# EAGLE board Projeto Lora (EAGLE 9.6.2)
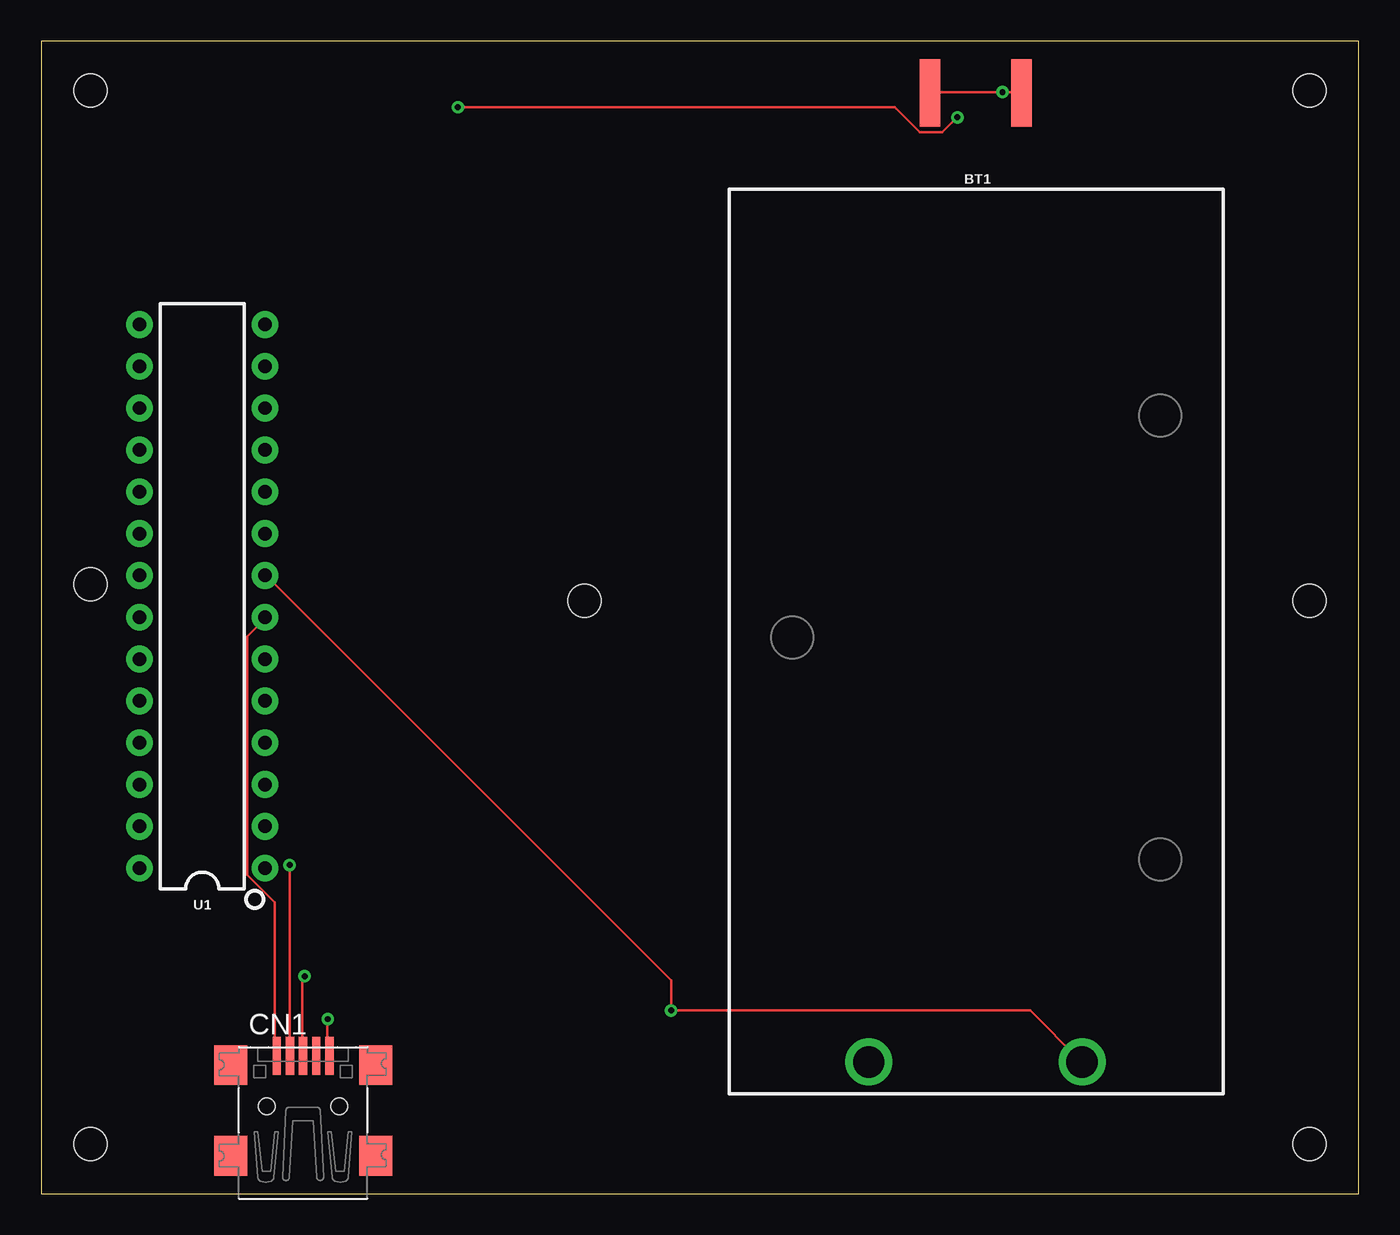
[diagram p0: board, top side]
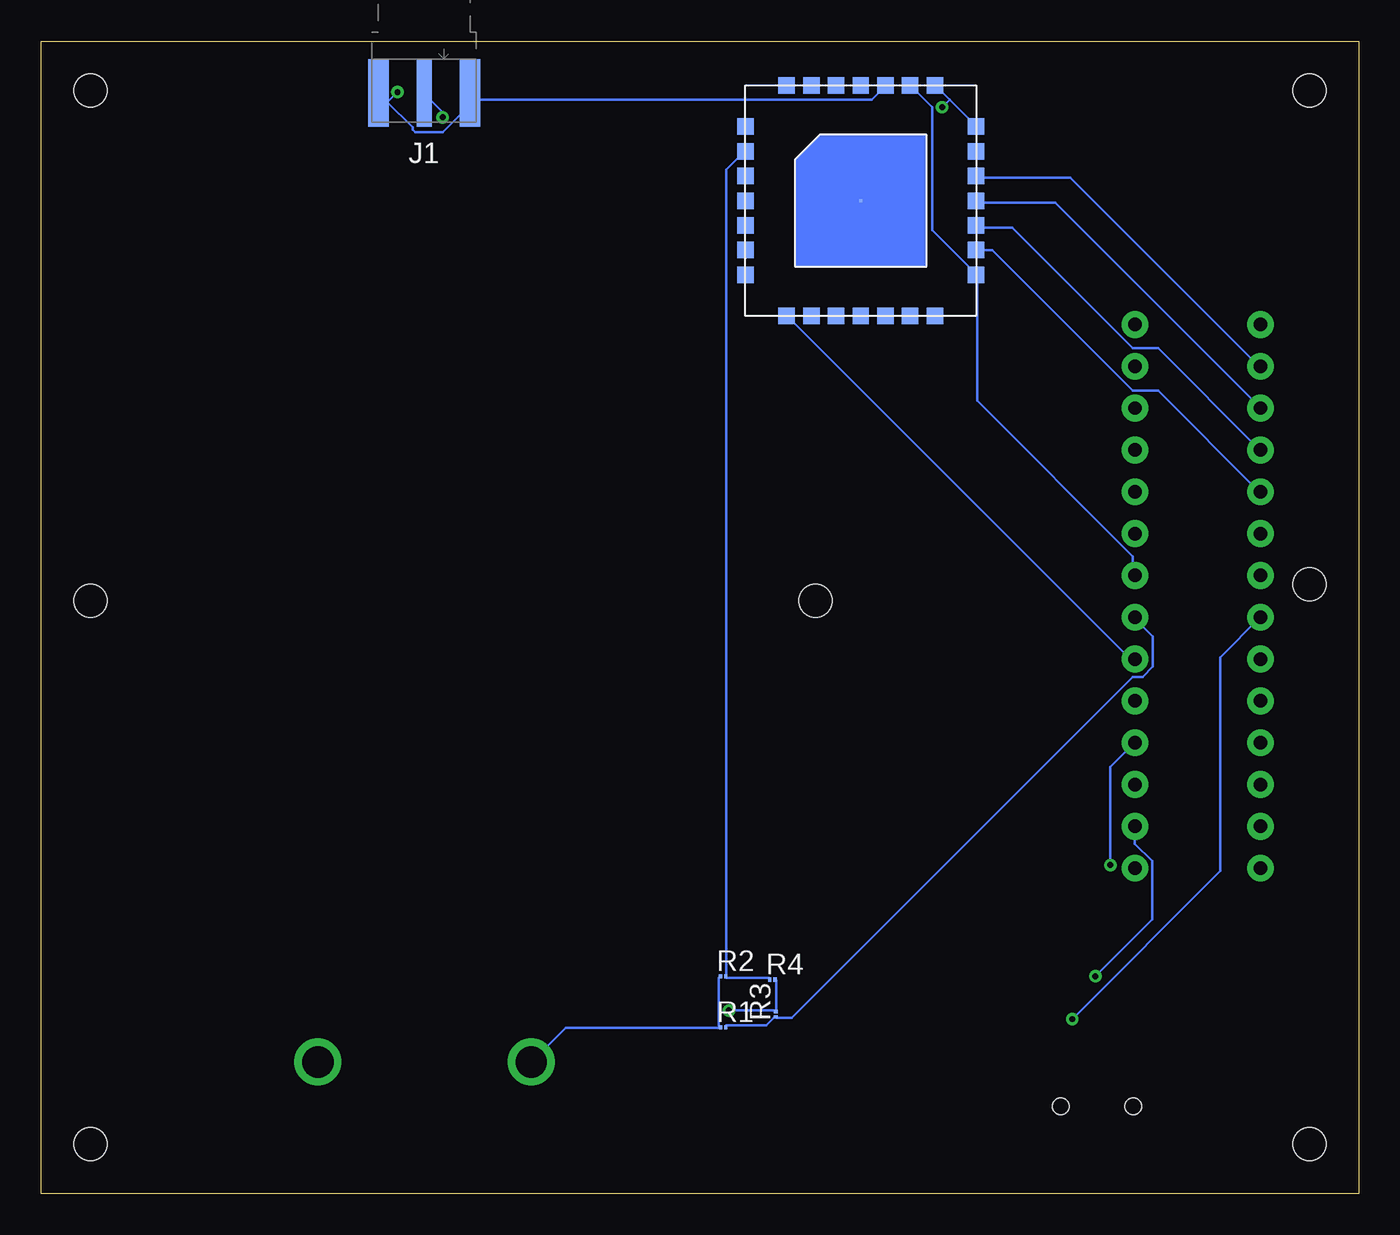
[diagram p1: board, bottom side, seen from below]

Size 80 x 70 mm. Coordinates in mm from the lower left corner, seen from the top.
Outline: 0,0 80,0 80,70 0,70 0,0
Copper layers (1*16): Top 0.035mm / dielectric 1.5mm / Bottom 0.035mm
Design rules "default": minimum track width 6mil, minimum drill 0.35mm, track to track 6mil, track to pad 6mil, pad to pad 6mil, via to via 6mil, smd to smd 6mil, copper to edge 40mil, drill to drill 6mil, minimum pad ring 10mil, minimum via ring 8mil, stop-mask expansion 4mil, vias tented up to drill 0mil, thermal gap 10mil
Holes 2 mm at 3,67 3,3 77,3 77,67 33,36 77,36 3,37

## Footprints (pad centres in the part's own frame; a part is rotated, then mirrored left to right if it is on the bottom)
BATTCON_9V = drill 1.905: + 0,0; - 0,-12.954
USB-MINIB = smd 0.5 x 2.308: D+ 0,4.064; D- -0.8,4.064; GND 1.6,4.064; ID 0.8,4.064; VBUS -1.6,4.064 | smd 2 x 2.4: GND1 -4.4,-2; GND2 -4.4,3.5; GND3 4.4,3.5; GND4 4.4,-2 | hole 1: -2.2,1; 2.2,1
60312202114508 = smd 0.9 x 4.1: 1 0,0 | smd 1.25 x 4.1: 2 -2.775,0; 3 2.775,0 | smd 1.25 x 4.1 bottom: 4 -2.775,0; 5 2.775,0
R01005 = smd 0.2 x 0.25: 1 -0.163,0; 2 0.163,0
DIP28 = drill 0.813 pad 1.626: 1 -16.51,-3.81; 2 -13.97,-3.81; 3 -11.43,-3.81; 4 -8.89,-3.81; 5 -6.35,-3.81; 6 -3.81,-3.81; 7 -1.27,-3.81; 8 1.27,-3.81; 9 3.81,-3.81; 10 6.35,-3.81; 11 8.89,-3.81; 12 11.43,-3.81; 13 13.97,-3.81; 14 16.51,-3.81; 15 16.51,3.81; 16 13.97,3.81; 17 11.43,3.81; 18 8.89,3.81; 19 6.35,3.81; 20 3.81,3.81; 21 1.27,3.81; 22 -1.27,3.81; 23 -3.81,3.81; 24 -6.35,3.81; 25 -8.89,3.81; 26 -11.43,3.81; 27 -13.97,3.81; 28 -16.51,3.81
PDIP = smd 1 x 1: DIO0 2.5,0; DIO1/DCLK 4,0; DIO2/DATA 5.5,0; DIO3 7,0; DIO4 8.5,0; DIO5 10,0; GND1 14,2.5; GND2 10,14; GND3 5.5,14; MISO 14,5.5; MOSI 14,7; NRESET 0,2.5; NSS 14,8.5; PAS_BOOST 4,14; RFI_HF 14,11.5; RFI_LF 0,11.5; RFO_HF 11.5,14; RFO_LF 2.5,14; RXTX/RF_MOD 14,10; SCK 14,4; VBAT_ANA 0,8.5; VBAT_DIG 11.5,0; VBAT_RF 8.5,14; VR_ANA 0,10; VR_DIG 0,7; VR_PA 7,14; XTA 0,5.5; XTB 0,4 | smd 0.2 x 0.2: GND0 7,7

## Placement (x,y rotation side)
BT1  [BATTCON_9V]  63.2,8 270 top
CN1  [USB-MINIB]  15.9,4.3 0 top
J1  60312202114508  [60312202114508]  56.75,66.84 180 bottom
R1  100 Ohms  [R01005]  38.6,10.1 0 bottom
R2  200 Ohms  [R01005]  38.6,13.2 0 bottom
R3  125 Ohms  [R01005]  35.4,10.9 90 bottom
R4  100 Ohms  [R01005]  35.6,13 0 bottom
U1  328P  [DIP28]  9.78,36.28 90 top
U$1  LORA-SX1278  [PDIP]  37.24,53.31 0 bottom

## Library data of the parts
BT1 = SparkFun-Batteries; PROD_ID: BATT-10855
CN1 = adafruit
J1 = 60312202114508; AVAILABILITY: In Stock; DESCRIPTION: SMA Connector Jack, Female Socket 50Ohm Board Edge, End Launch Solder; MF: Würth Elektronik; MP: SMA Connector; PACKAGE: None; PRICE: None; PURCHASE-URL: https://pricing.snapeda.com/search/part/60312202114508/?ref=eda
R1-R4 = resistor
U1 = SparkFun-IC-Microcontroller; PROD_ID: IC-09136
U$1 = SX1278

## Nets
GND0: U$1.GND0
GND3: U$1.GND3
N$1: U$1.NRESET
N$2: U1.6 U$1.DIO0
N$3: U1.19 U$1.SCK
N$4: U1.18 U$1.MISO
N$5: U1.17 U$1.MOSI
N$6: U1.16 U$1.NSS
N$7: J1.1 U$1.RFI_HF U$1.RFO_HF
N$8: CN1.VBUS R1.2 R3.1 U1.7
N$9: R2.2 R4.1 U$1.VR_ANA
N$10: J1.2 J1.3 J1.4 J1.5 U$1.VBAT_RF
N$11: BT1.- R1.1 R2.1
N$12: BT1.+ R3.2 R4.2 U1.8 U$1.GND1 U$1.GND2
N$13: U$1.VBAT_ANA
N$14: CN1.GND U1.22
N$15: CN1.D+ U1.2
N$16: CN1.D- U1.4
VBAT_DIG: U$1.VBAT_DIG
VR_DIG: U$1.VR_DIG
VR_PA: U$1.VR_PA

## Tracks (layer width: path | path; a pad name or v marks a point on that pad's centre or on a via)
N$2
  Bottom 0.152: U$1.DIO0 34.59,53.19 14.02,32.61 13.72,32.61 U1.6
N$3
  Bottom 0.152: U$1.SCK 23.16,57.3 22.25,57.3 13.72,48.77 12.19,48.77 6.1,42.67 U1.19
N$4
  Bottom 0.152: U$1.MISO 23.16,58.67 21.03,58.67 13.72,51.36 12.19,51.36 6.1,45.26 U1.18
N$5
  Bottom 0.152: U$1.MOSI 23.16,60.2 18.44,60.2 6.1,47.85 U1.17
N$6
  Bottom 0.152: U$1.NSS 23.16,61.72 17.53,61.72 6.1,50.29 U1.16
N$7  (via drill 0.35)
  Top 0.152: v25.3,65.99 51.82,65.99 53.34,64.47 54.71,64.47 v55.63,65.38
  Bottom 0.152: 24.84,66.45 25.6,67.21 U$1.RFO_HF | 24.84,66.45 23.32,64.92 U$1.RFI_HF | v25.3,65.99 24.84,66.45 | v55.63,65.38 55.63,65.68 56.69,66.75 J1.1
N$8
  Top 0.152: CN1.VBUS 14.17,8.38 14.17,17.68 12.5,19.36 12.5,33.83 13.56,34.9 U1.7
  Bottom 0.152: R1.2 38.41,10.21 35.97,10.21 35.51,10.67 R3.1 35.36,10.67 34.44,10.67 13.72,31.39 13.11,31.39 12.5,32 12.5,33.83 13.56,34.9 U1.7
N$9
  Bottom 0.152: R4.1 35.81,13.11 38.41,13.11 R2.2 38.41,13.26 38.41,62.18 37.34,63.25 U$1.VR_ANA
N$10  (via drill 0.35)
  Top 0.152: J1.4 54.1,66.9 v58.37,66.9 59.44,66.9 J1.5
  Bottom 0.152: 53.65,66.45 29.57,66.45 28.8,67.21 U$1.VBAT_RF | 53.65,66.45 53.95,66.75 J1.4 53.65,66.45 | 58.98,66.29 57.45,64.77 57.45,64.62 57.3,64.47 55.63,64.47 53.65,66.45 | 58.98,66.29 59.44,66.75 J1.5 58.98,66.29 | 58.98,66.29 v58.37,66.9
N$11
  Bottom 0.152: R2.1 38.86,13.11 38.86,10.21 R1.1 38.86,10.06 48.16,10.06 50.14,8.08 BT1.-
N$12  (via drill 0.35)
  Top 0.152: BT1.+ 63.09,8.08 60.05,11.12 v38.25,11.12 38.25,12.95 13.72,37.49 U1.8
  Bottom 0.152: R4.2 35.36,12.95 35.36,11.12 R3.2 35.51,11.12 v38.25,11.12 | U$1.GND2 27.13,67.21 25.91,65.99 25.91,58.52 23.32,55.93 U$1.GND1 23.16,55.78 23.16,48.16 13.72,38.71 13.72,37.64 U1.8
N$14  (via drill 0.35)
  Top 0.152: CN1.GND 17.37,8.38 17.37,10.57 v17.4,10.6
  Bottom 0.152: v17.4,10.6 8.4,19.6 8.4,32.58 U1.22
N$15  (via drill 0.35)
  Top 0.152: CN1.D+ 15.85,8.38 15.85,13.05 v16,13.2
  Bottom 0.152: U1.2 13.59,21.24 12.55,20.2 12.55,16.65 v16,13.2
N$16  (via drill 0.35)
  Top 0.152: v15.09,19.96 15.09,8.38 CN1.D-
  Bottom 0.152: v15.09,19.96 15.09,25.91 13.72,27.28 U1.4